# Altium PCB shoot sensor.PcbDoc
Units mm, origin at the board's own origin, x right, y up, seen from the top; angles counter-clockwise.
Board outline 50.54 x 7.87 mm, 2 copper layers (Top Layer, Bottom Layer); 4 components, 5 nets, 13 pads, 0 vias.
Unrouted connection lines stored in the file: 2.
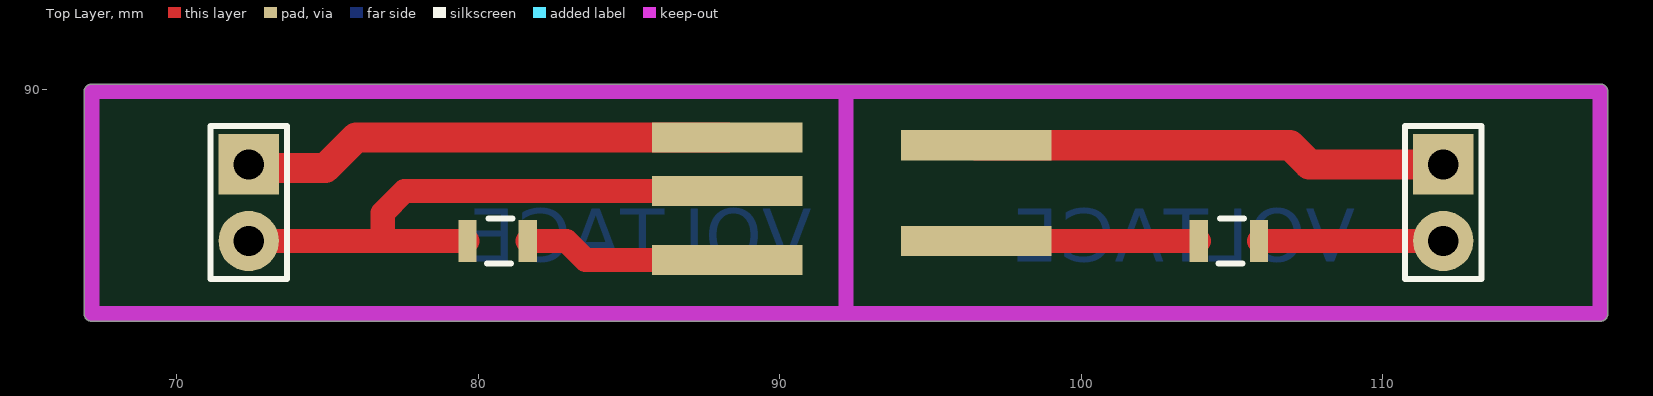
[diagram p0: Top Layer view]
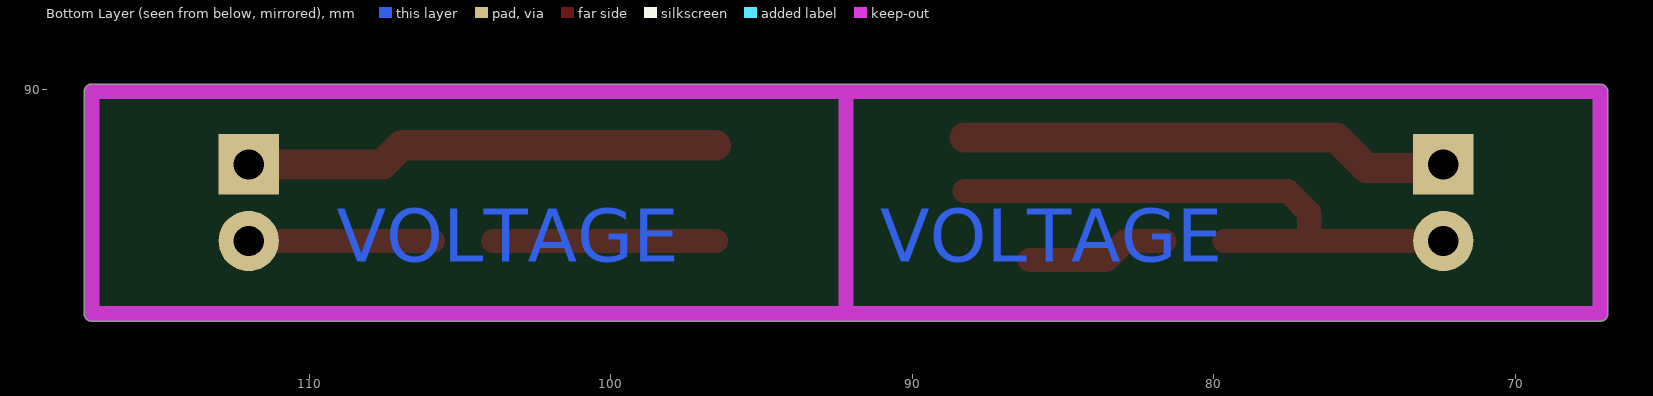
[diagram p1: Bottom Layer view, seen from below]

## Layer stack, top to bottom
Top Solder: solder mask 0.0102, Solder Resist, Dk 3.5
Top Layer: signal copper 0.0356
Dielectric 1: dielectric 0.32, FR-4, Dk 4.8
Bottom Layer: signal copper 0.0356
Bottom Solder: solder mask 0.0102, Solder Resist, Dk 3.5

## Board outline
67.183,82.3 cw(c67.183,82.55) 66.933,82.55 66.933,89.916 cw(c67.183,89.916) 67.183,90.166 92.202,90.166 117.221,90.166 cw(c117.221,89.916) 117.471,89.916 117.471,82.55 cw(c117.221,82.55) 117.221,82.3 92.202,82.3

## Design rules (kind name [scope] priority, off if disabled: settings)
Clearance [All] p1: gap=0.254 ignorepadtopadclearanceinfootprint=FALSE except(0: Arc-Hole Track-Hole SMDPad-Hole THPad-Hole Via-Hole Fill-Hole Poly-Hole Region-Hole Text-Hole)
PolygonConnect [All] p1: connectstyle=Relief reliefconductorwidth=0.254 reliefentries=4 polygonreliefangle="90 Angle" airgapwidth=0.254
RoutingVias [All] p1: holewidth=0.711 width=1.27 viastyle="Through Hole" minholewidth=0.711 minwidth=1.27 maxholewidth=0.711 maxwidth=1.27
SolderMaskExpansion [All] p1: expansion=0.102
Width [All] p1: maxlimit=3 minlimit=0.254 preferedwidth=1
30 further rules are at their usual default settings.

## Components (designator, comment, footprint, x,y, rotation, side; value= is the part's Value field where it differs from the comment)
? "Comment" MY_RES_SMD_0805 80.645,84.963 r180 top
? "Comment" MY_RES_SMD_0805 104.902,84.963 r180 top
? "Comment" HDR1X2 72.39,87.503 r270 top
? "Comment" HDR1X2 112.014,87.503 r270 top

## Footprints (in the part's own frame and the unit in brackets; to place one, negate y for a bottom-side part, rotate by r counter-clockwise, add the part's x,y. Pads: shape width x height; smd on the part's side, far side on the other; paste and mask are expansions set on the pad)
HDR1X2 [mm] "Connector; Header; 2 Position"
  rect 2x2 hole 1: 1(0,0)
  round 2 hole 1: 2(2.54,0)
  silkscreen extent -1.27,-1.27 3.81,1.27
MY_RES_SMD_0805 [mm]
  rect 0.6x1.4 smd: 1(-1,0) 2(1,0)
  silkscreen extent -0.5,-0.75 0.35,0.75, body extent -1,-0.62 1,0.63, height 0.78

## Free pads (board coordinates)
  rect 5x1 smd: 3(88.265,84.328) 3(88.265,86.614) 3(88.265,88.392) 3(96.52,84.963) 3(96.52,88.138)

## Nets (pads, with @x,y where several pads share a name; then routed paths per layer and width w, separated by ;. In a path a pad name is that pad's centre, name@x,y a point inside that pad or via, vN(x,y) a via of type N, cw(c..) or ccw(c..) an arc to the next point about the centre after c; other vN are vias at no path point)
GND: ?.1@81.645,84.963 ?.2@103.902,84.963 pad.3@88.265,84.328 pad.3@96.52,84.963 | length 12.1
  Top Layer w0.8: ?.1@81.645,84.963 82.931,84.963 83.566,84.328 pad.3@86.106,84.328 ; pad.3@96.52,84.963 ?.2@103.902,84.963
OUT: ?.2@72.39,84.963 ?.2@79.645,84.963 pad.3@88.265,86.614 | length 19.9
  Top Layer w0.8: ?.2@72.39,84.963 76.835,84.963 ; ?.2@79.645,84.963 76.835,84.963 ; pad.3@88.265,86.614 88.011,86.614 77.558,86.614 76.835,85.891 76.835,84.963
reciever: 
transmitter: ?.1@105.902,84.963 ?.2@112.014,84.963 | length 6.1
  Top Layer w0.8: ?.1@105.902,84.963 ?.2@112.014,84.963
VCC: ?.1@72.39,87.503 ?.1@112.014,87.503 pad.3@88.265,88.392 pad.3@96.52,88.138 | length 32.1
  Top Layer w1: ?.1@72.39,87.503 72.517,87.376 74.93,87.376 75.946,88.392 pad.3@88.265,88.392 ; pad.3@96.52,88.138 106.934,88.138 107.569,87.503 ?.1@112.014,87.503

## Keep-outs
Keep-Out Layer:
  lines w0.5: 92.202,82.55 117.221,82.55 117.221,89.916 92.202,89.916 ; 92.202,82.55 92.202,89.916 ; 92.202,82.55 67.183,82.55 67.183,89.916 92.202,89.916

## Other copper
Bottom Layer:
  text "VOLTAGE" at 91.059,83.693 h3
  text "VOLTAGE" at 109.093,83.693 h3